# Altium PCB SW-TH_6P-L5.8-W5.8-P2.00-LS4.5-BL_2022-10-04.pcbdoc
Units mm, origin at the board's own origin, x right, y up, seen from the top; angles counter-clockwise.
Board outline 35.64 x 31.75 mm, 2 copper layers (Top Layer, Bottom Layer); 1 components, 0 nets, 6 pads, 0 vias.
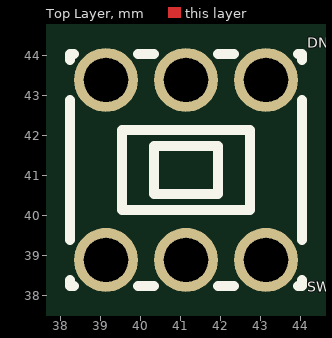
[diagram p0: Top Layer view]
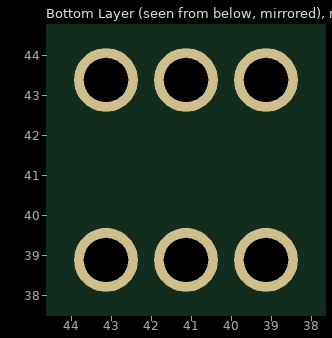
[diagram p1: Bottom Layer view, seen from below]

## Layer stack, top to bottom
Top Layer: signal copper (thickness not stored)
Dielectric: dielectric 0.32, FR-4, Dk 4.8
Bottom Layer: signal copper (thickness not stored)

## Board outline
61.045,25.4 25.4,25.4 25.4,57.154 61.045,57.154

## Components (designator, comment, footprint, x,y, rotation, side; value= is the part's Value field where it differs from the comment)
DNSW? "SW-TH_6P-L5.8-W5.8-P2.00-LS4.5-BL" SW-TH_6P-L5.8-W5.8-P2.00-LS4.5-BL 41.127,41.15 r0 top

## Footprints (in the part's own frame and the unit in brackets; to place one, negate y for a bottom-side part, rotate by r counter-clockwise, add the part's x,y. Pads: shape width x height; smd on the part's side, far side on the other; paste and mask are expansions set on the pad)
SW-TH_6P-L5.8-W5.8-P2.00-LS4.5-BL [mm]
  round 1.6 hole 1.1 slot 1.105 at 0 deg: 1(-2,-2.25) 2(0,-2.25) 3(2,-2.25) 4(-2,2.25) 5(0,2.25) 6(2,2.25)
  silkscreen extent -2.9,-2.9 2.9,2.9

## Nets (pads, with @x,y where several pads share a name; then routed paths per layer and width w, separated by ;. In a path a pad name is that pad's centre, name@x,y a point inside that pad or via, vN(x,y) a via of type N, cw(c..) or ccw(c..) an arc to the next point about the centre after c; other vN are vias at no path point)
pads on no net: DNSW?.1 DNSW?.2 DNSW?.3 DNSW?.4 DNSW?.5 DNSW?.6

## Silkscreen, mask and mechanical layers (free items; w line width, h text height)
Document:
  lines w0.003: 43.222,41.277 43.223,41.277